# EAGLE board ground_station_boardv1.1 (EAGLE 9.6.2)
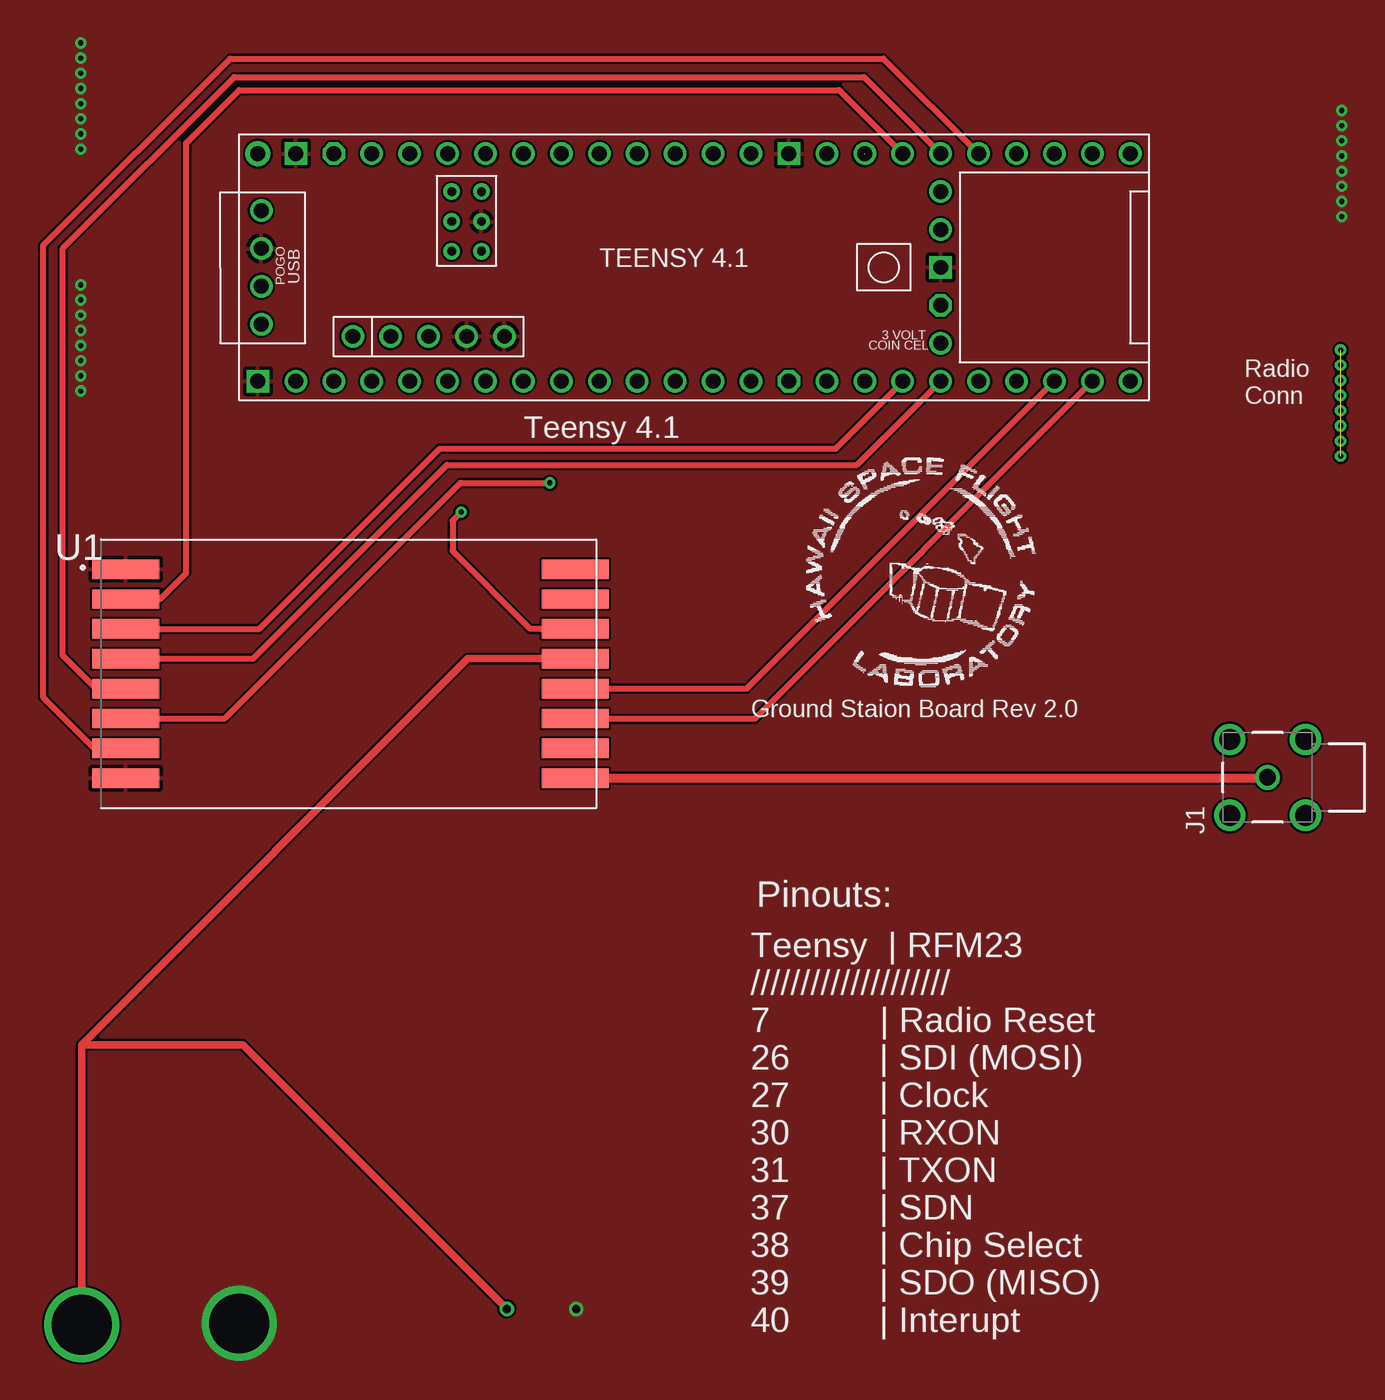
[diagram p0: board, top side]
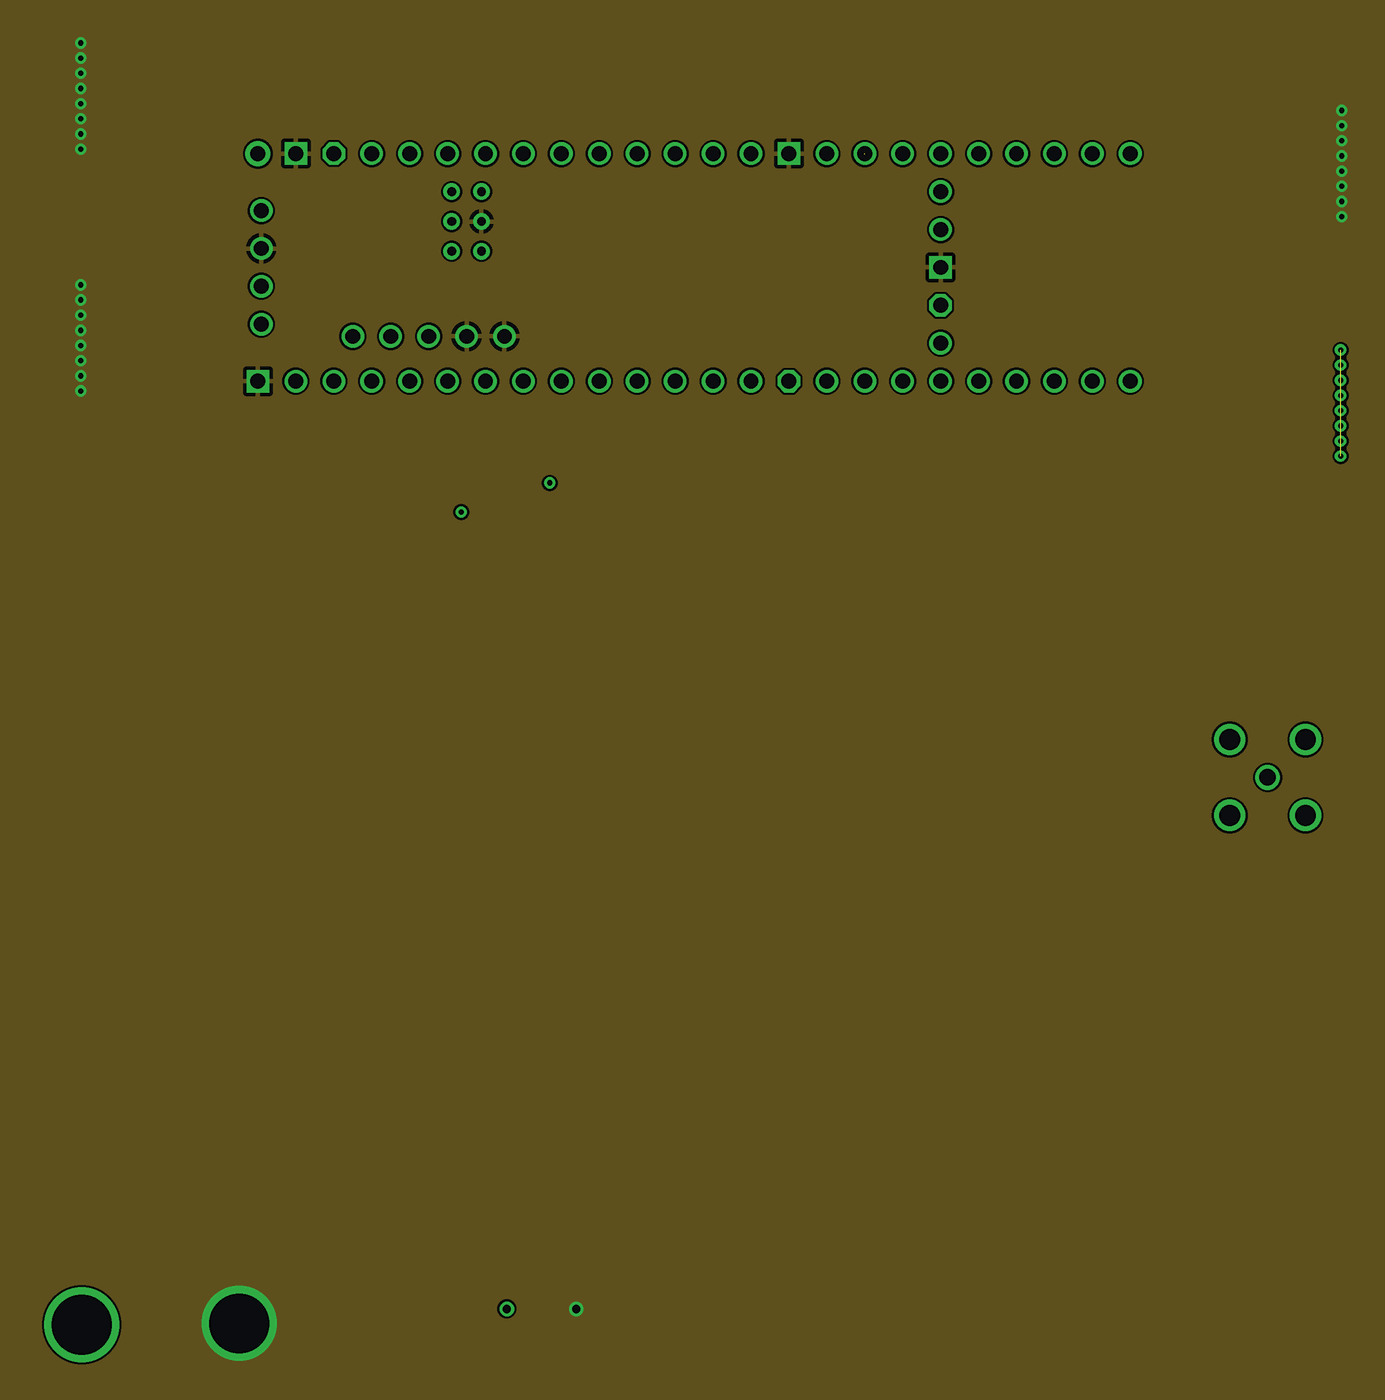
[diagram p1: board, inner layer Route2]
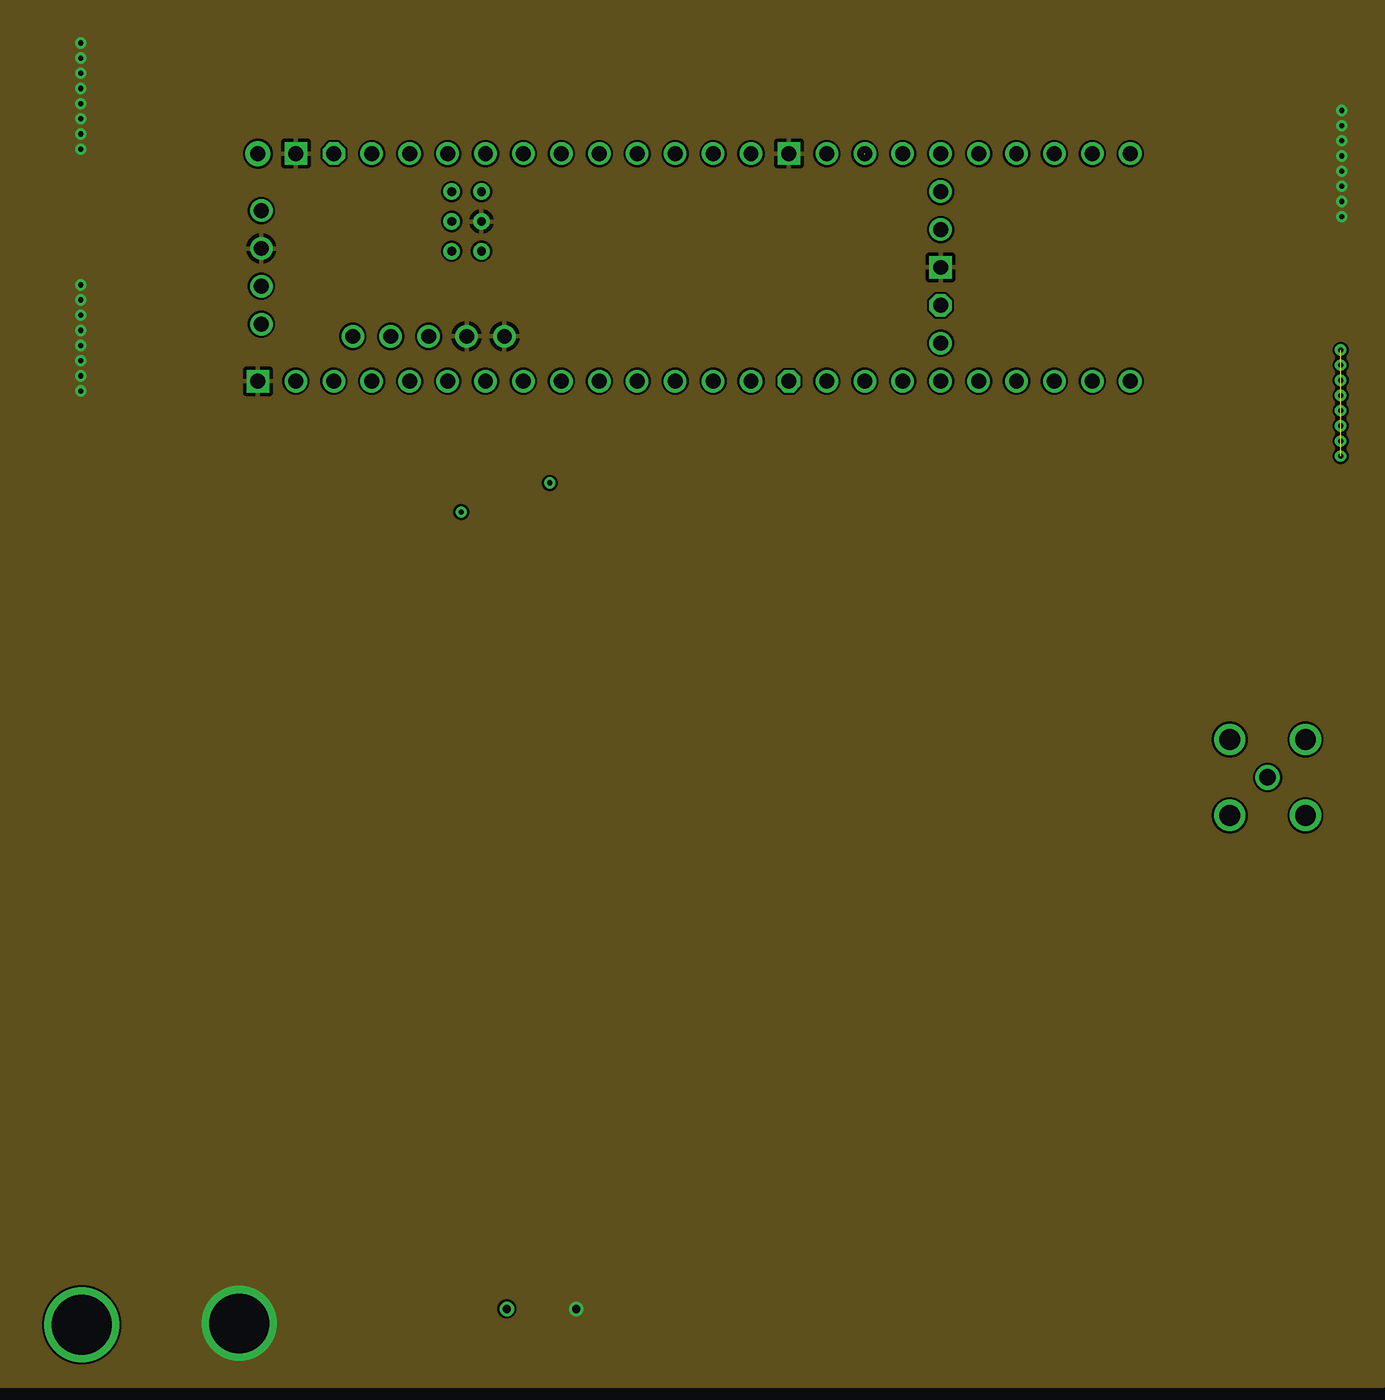
[diagram p2: board, inner layer Route15]
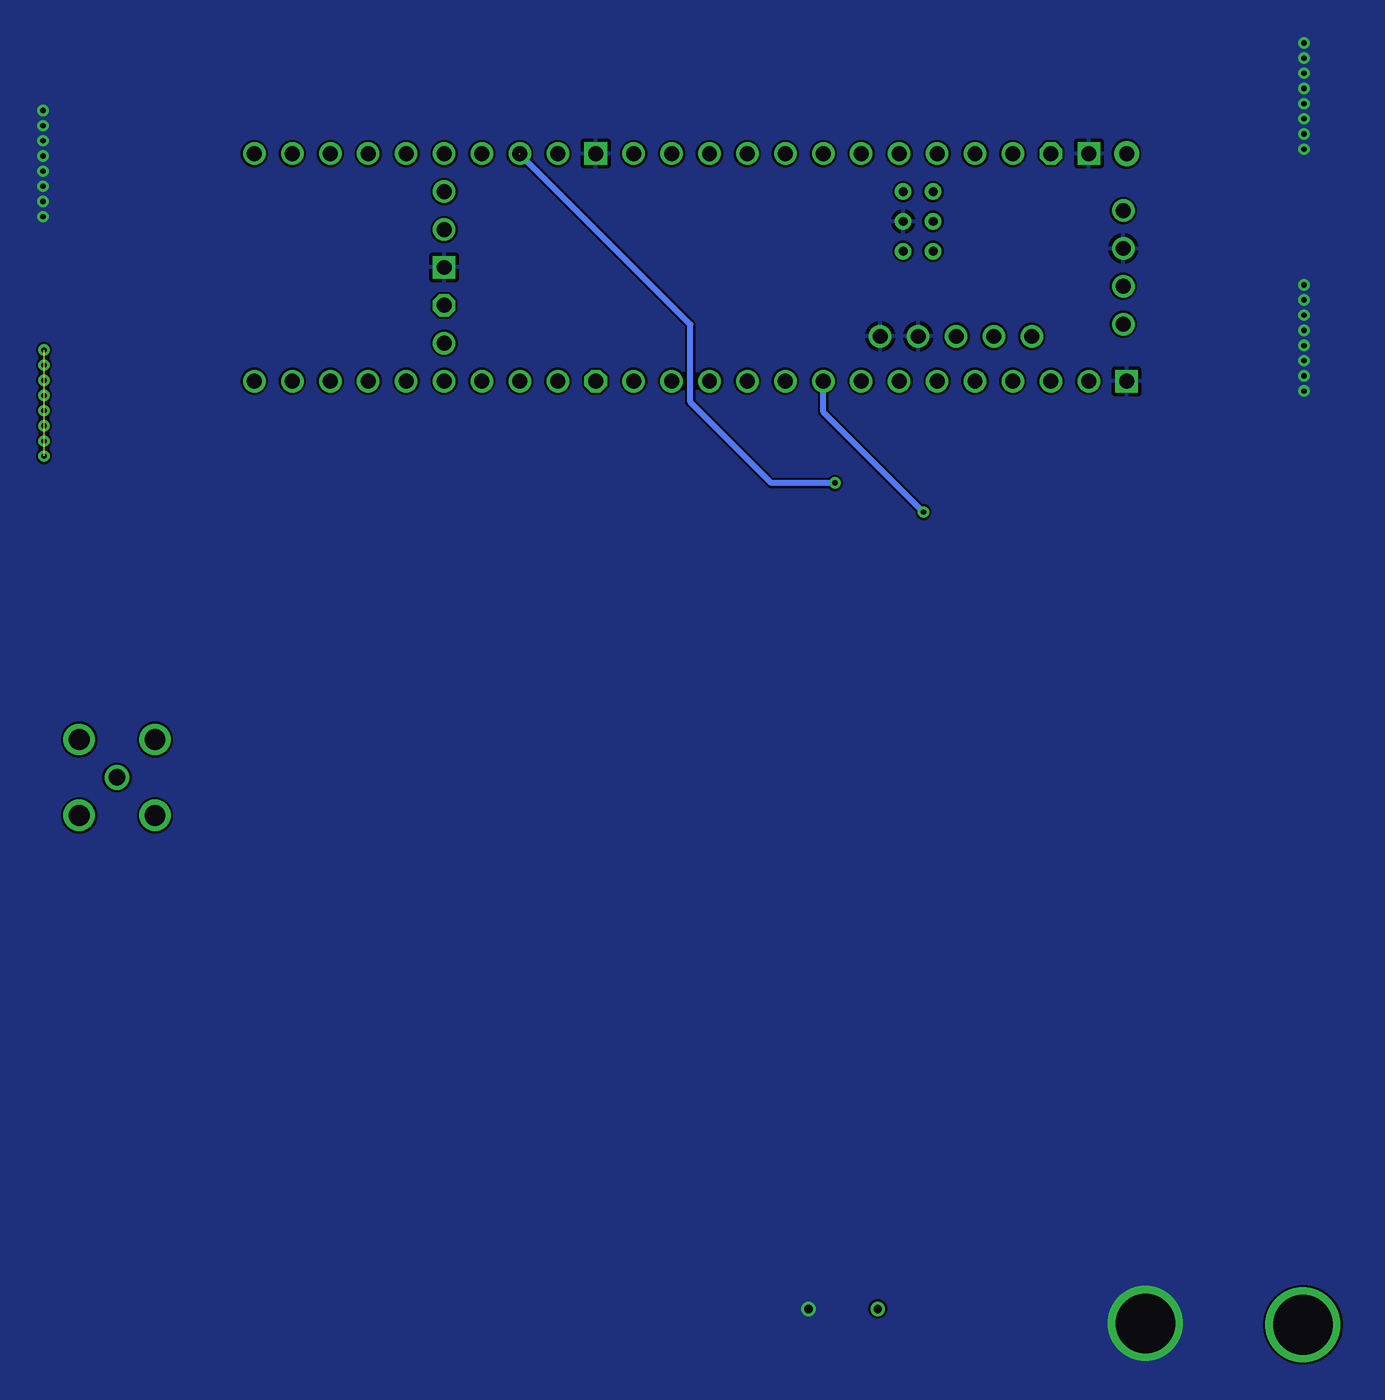
[diagram p3: board, bottom side, seen from below]

No outline drawn. Coordinates in mm, seen from the top.
Copper layers (1+2*15+16): Top 0.035mm / dielectric 1.5mm / Route2 0.035mm / dielectric 0.15mm / Route15 0.035mm / dielectric 0.2mm / Bottom 0.035mm
Design rules "default *": minimum track width 6mil, minimum drill 8mil, track to track 6mil, track to pad 6mil, pad to pad 6mil, via to via 6mil, smd to smd 6mil, copper to edge 40mil, drill to drill 6mil, minimum pad ring 10mil, minimum via ring 8mil, stop-mask expansion 4mil, vias tented up to drill 0mil, thermal gap 10mil
Net classes: 1 highpower: width 0.406 mm, drill 0.483 mm; 2 lowpower: width 0.305 mm, drill 0.483 mm

## Footprints (pad centres in the part's own frame; a part is rotated, then mirrored left to right if it is on the bottom)
SAMTEC_MCX-J-P-H-RA-TH1 = drill 1.1: 1 0,0 | drill 1.4: S1 -2.54,2.54; S2 2.54,2.54; S3 2.54,-2.54; S4 -2.54,-2.54
RFM23BP = smd 4.5 x 1.3: 1 -14.55,7; 2 -14.55,5; 3 -14.55,3; 4 -14.55,1; 5 -14.55,-1; 6 -14.55,-3; 7 -14.55,-5; 8 -14.55,-7; 9 15.55,-7; 10 15.55,-5; 11 15.55,-3; 12 15.55,-1; 13 15.55,1; 14 15.55,3; 15 15.55,5; 16 15.55,7
TEENSY41 = drill 1: 0-RX1/CS1/CRX2 -27.94,-7.62; 1-TX1/MISO1/CTX2 -25.4,-7.62; 2-OUT2 -22.86,-7.62; 3-LRCLK2 -20.32,-7.62; 4-BCLK2 -17.78,-7.62; 5-IN2 -15.24,-7.62; 6-OUT1D -12.7,-7.62; 7-RX2/OUT1A -10.16,-7.62; 8-TX2/IN1 -7.62,-7.62; 9-OUT1C -5.08,-7.62; 10-CS\MQSR -2.54,-7.62; 11-MOSI/CTX1 0,-7.62; 12-MISO/MQSL 2.54,-7.62; 13-SCK/LED 2.54,7.62; 14-A0/TX3/SPDIF_OUT 0,7.62; 15-A1/RX3/SPDIF_IN -2.54,7.62; 16-A2/RX4/SCL1 -5.08,7.62; 17-A3/TX4/SDA1 -7.62,7.62; 18-A4/SDA0 -10.16,7.62; 19-A5/SCL0 -12.7,7.62; 20-A6/TX5/LRCLK1 -15.24,7.62; 21-A7/RX5/BCLK1 -17.78,7.62; 22-A8/CTX1 -20.32,7.62; 23-A9/CRX1/MCLK1 -22.86,7.62; 24-A10/TX6/SCL2 7.62,-7.62; 25-A11/RX6/SDA2 10.16,-7.62; 26-A12/MOSI1 12.7,-7.62; 27-A13/SCK1 15.24,-7.62; 28-RX7 17.78,-7.62; 29-TX7 20.32,-7.62; 30-CRX3 22.86,-7.62; 31-CTX3 25.4,-7.62; 32-OUT1B 27.94,-7.62; 33-MCLK2 27.94,7.62; 34-RX8 25.4,7.62; 35-TX8 22.86,7.62; 36-PWM 20.32,7.62; 37-PWM 17.78,7.62; 38-A14/CS/IN1 15.24,7.62; 39-A15/CS/OUT1A 12.7,7.62; 40-A16/CS1 10.16,7.62; 41-A17/MISO1 7.62,7.62; +5V -24.13,-4.62; D+ -30.25,-3.81; D- -30.25,-1.27; DM -21.59,-4.62; DP -19.05,-4.62; GND -30.25,1.27; GND4 -16.51,-4.62; GND5 -13.97,-4.62; ON/OFF 15.24,5.08; PROGRAM 15.24,2.54; VBAT 15.24,-5.08; VUSB -30.25,3.81 | drill 1 octagon: 3V3-1 5.08,-7.62; 3V3-2 15.24,-2.54; 3V3-3 -25.4,7.62 | drill 0.6: G -15.51,3.08; LED -17.51,3.08; R+ -17.51,5.08; R- -15.51,5.08; T+ -15.51,1.08; T- -17.51,1.08 | drill 1 square: GND1 -30.48,-7.62; GND2 15.24,0; GND3 5.08,7.62; GND6 -27.94,7.62 | drill 1 pad 1.676: VIN -30.48,7.62

## Placement (x,y rotation side)
J1  MCX-J-P-H-RA-TH1  [SAMTEC_MCX-J-P-H-RA-TH1]  83.66,37.56 90 top
U1  RFM23BP  [RFM23BP]  21.74,44.51 0 top
U$1  TEENSY41TEENSY  [TEENSY41]  46.52,71.73 0 top

## Library data of the parts
J1 = OBCv4; DESCRIPTION: MCX Connector Jack, Female Socket 50Ohm Through Hole, Right Angle Solder; DIGI-KEY_PART_NUMBER: SAM10607-ND; MF: Samtec; MP: MCX-J-P-H-RA-TH1; PACKAGE: None; PURCHASE-URL: https://pricing.snapeda.com/search/part/MCX-J-P-H-RA-TH1/?ref=eda
U1 = RFM RADIOS
U$1 = OBCv4

## Nets
ANT_GND: U1.10
DIO1: U1.15
GND: U1.1 U1.8 U$1.G U$1.GND U$1.GND1 U$1.GND2 U$1.GND3 U$1.GND4 U$1.GND5 U$1.GND6
N$1: J1.1 U1.9
NIRQ: U1.6 U$1.40-A16/CS1
PWR_IN: U1.13
RADIO_RESET: U1.14 U$1.7-RX2/OUT1A
RX_ON: U1.12 U$1.30-CRX3
SDN: U1.7 U$1.37-PWM
SPI1_CS1: U1.5 U$1.38-A14/CS/IN1
SPI1_D0: U1.2 U$1.39-A15/CS/OUT1A
SPI1_D1: U1.3 U$1.26-A12/MOSI1
SPI1_SCLK: U1.4 U$1.27-A13/SCK1
TX_ON: U1.11 U$1.31-CTX3

## Tracks (layer width: path | path; a pad name or v marks a point on that pad's centre or on a via)
GND  (via drill 0.35, 0.55, 4)
  other vias: 4.17,79.65 4.17,81.69 4.17,82.7 4.17,83.72 4.17,84.73 4.17,85.75 4.17,86.77 4.17,80.67 4.17,63.45 4.17,65.48 4.17,66.5 4.17,67.51 4.17,68.53 4.17,69.55 4.17,70.56 4.17,64.47 88.62,75.13 88.62,77.17 88.62,78.18 88.62,79.2 88.62,80.21 88.62,81.23 88.62,82.25 88.62,76.15 14.79,0.98 37.35,1.95
  pour Top: 92.52,-5.29 92.52,98.21 -4.78,98.21 -4.78,-5.29
  pour Bottom: -5.78,98.91 -5.78,-6.19 93.22,-6.19 93.22,98.91
  pour Route2: 93.4,98.2 0.6,98.2 -3,98.2 -3,-5.8 93.4,-5.8
  pour Route15: 91.4,97 -3.8,97 -3.8,-3.2 91.4,-3.2
GND2  (via drill 0.35)  (7 unrouted)
  other vias: 88.55,59.08 88.55,61.12 88.55,62.13 88.55,63.15 88.55,64.16 88.55,65.18 88.55,66.2 88.55,60.1
N$1
  Top 0.152: 83.61,37.51 J1.1
  Top 0.61: U1.9 83.61,37.51
NIRQ  (via drill 0.35)  (1 unrouted)
  Top 0.406: U1.6 13.82,41.51 29.6,57.29 v35.58,57.29
  Bottom 0.406: v35.58,57.29 39.84,57.29 45.26,62.71 45.26,67.9 56.68,79.32
PWR_IN  (via drill 0.55, 4)
  Top 0.508: v4.24,0.89 4.24,19.65 | U1.13 30.1,45.51 4.24,19.65 | v32.71,1.95 15.01,19.65 4.24,19.65
RADIO_RESET  (via drill 0.35)
  Top 0.406: U1.14 34.29,47.51 29.07,52.73 29.07,54.76 v29.65,55.34
  Bottom 0.406: v29.65,55.34 36.36,62.05 U$1.7-RX2/OUT1A
RX_ON
  Top 0.406: U1.12 48.78,43.51 U$1.30-CRX3
SDN
  Top 0.406: U1.7 5.06,39.51 1.67,42.9 1.67,73.22 14.17,85.72 57.93,85.72 U$1.37-PWM
SPI1_CS1
  Top 0.406: U1.5 5.18,43.51 2.97,45.72 2.97,73.01 14.44,84.48 56.63,84.48 U$1.38-A14/CS/IN1
SPI1_D0
  Top 0.406: U1.2 9.49,49.51 11.23,51.25 11.23,80.06 14.78,83.61 54.96,83.61 U$1.39-A15/CS/OUT1A
SPI1_D1
  Top 0.406: U1.3 16.14,47.51 28.22,59.59 54.73,59.59 59.22,64.08 U$1.26-A12/MOSI1
SPI1_SCLK
  Top 0.406: U1.4 15.72,45.51 28.7,58.49 56.14,58.49 U$1.27-A13/SCK1
TX_ON
  Top 0.406: U1.11 37.31,41.49 49.3,41.49 U$1.31-CTX3

## Text on the board
tPlace: Teensy 4.1
tNames: Radio / Conn | Ground Staion Board Rev 2.0 | Pinouts: | Teensy | RFM23 / //////////////////// / 7 | Radio Reset / 26 | SDI (MOSI) / 27 | Clock / 30 | RXON / 31 | TXON / 37 | SDN / 38 | Chip Select / 39 | SDO (MISO) / 40 | Interupt